# Altium PCB PCB.PcbDoc (part 2 of 2)
Units mm, origin at the board's own origin, x right, y up, seen from the top; angles counter-clockwise.
Board outline 50 x 50 mm, 8 copper layers (Top Layer, Int1, Int2, Int3, Int4, Int5, Int6, Bottom Layer), stack 1.511 mm thick; 61 components, 338 nets, 626 pads, 186 vias.
Unrouted connection lines stored in the file: 201.
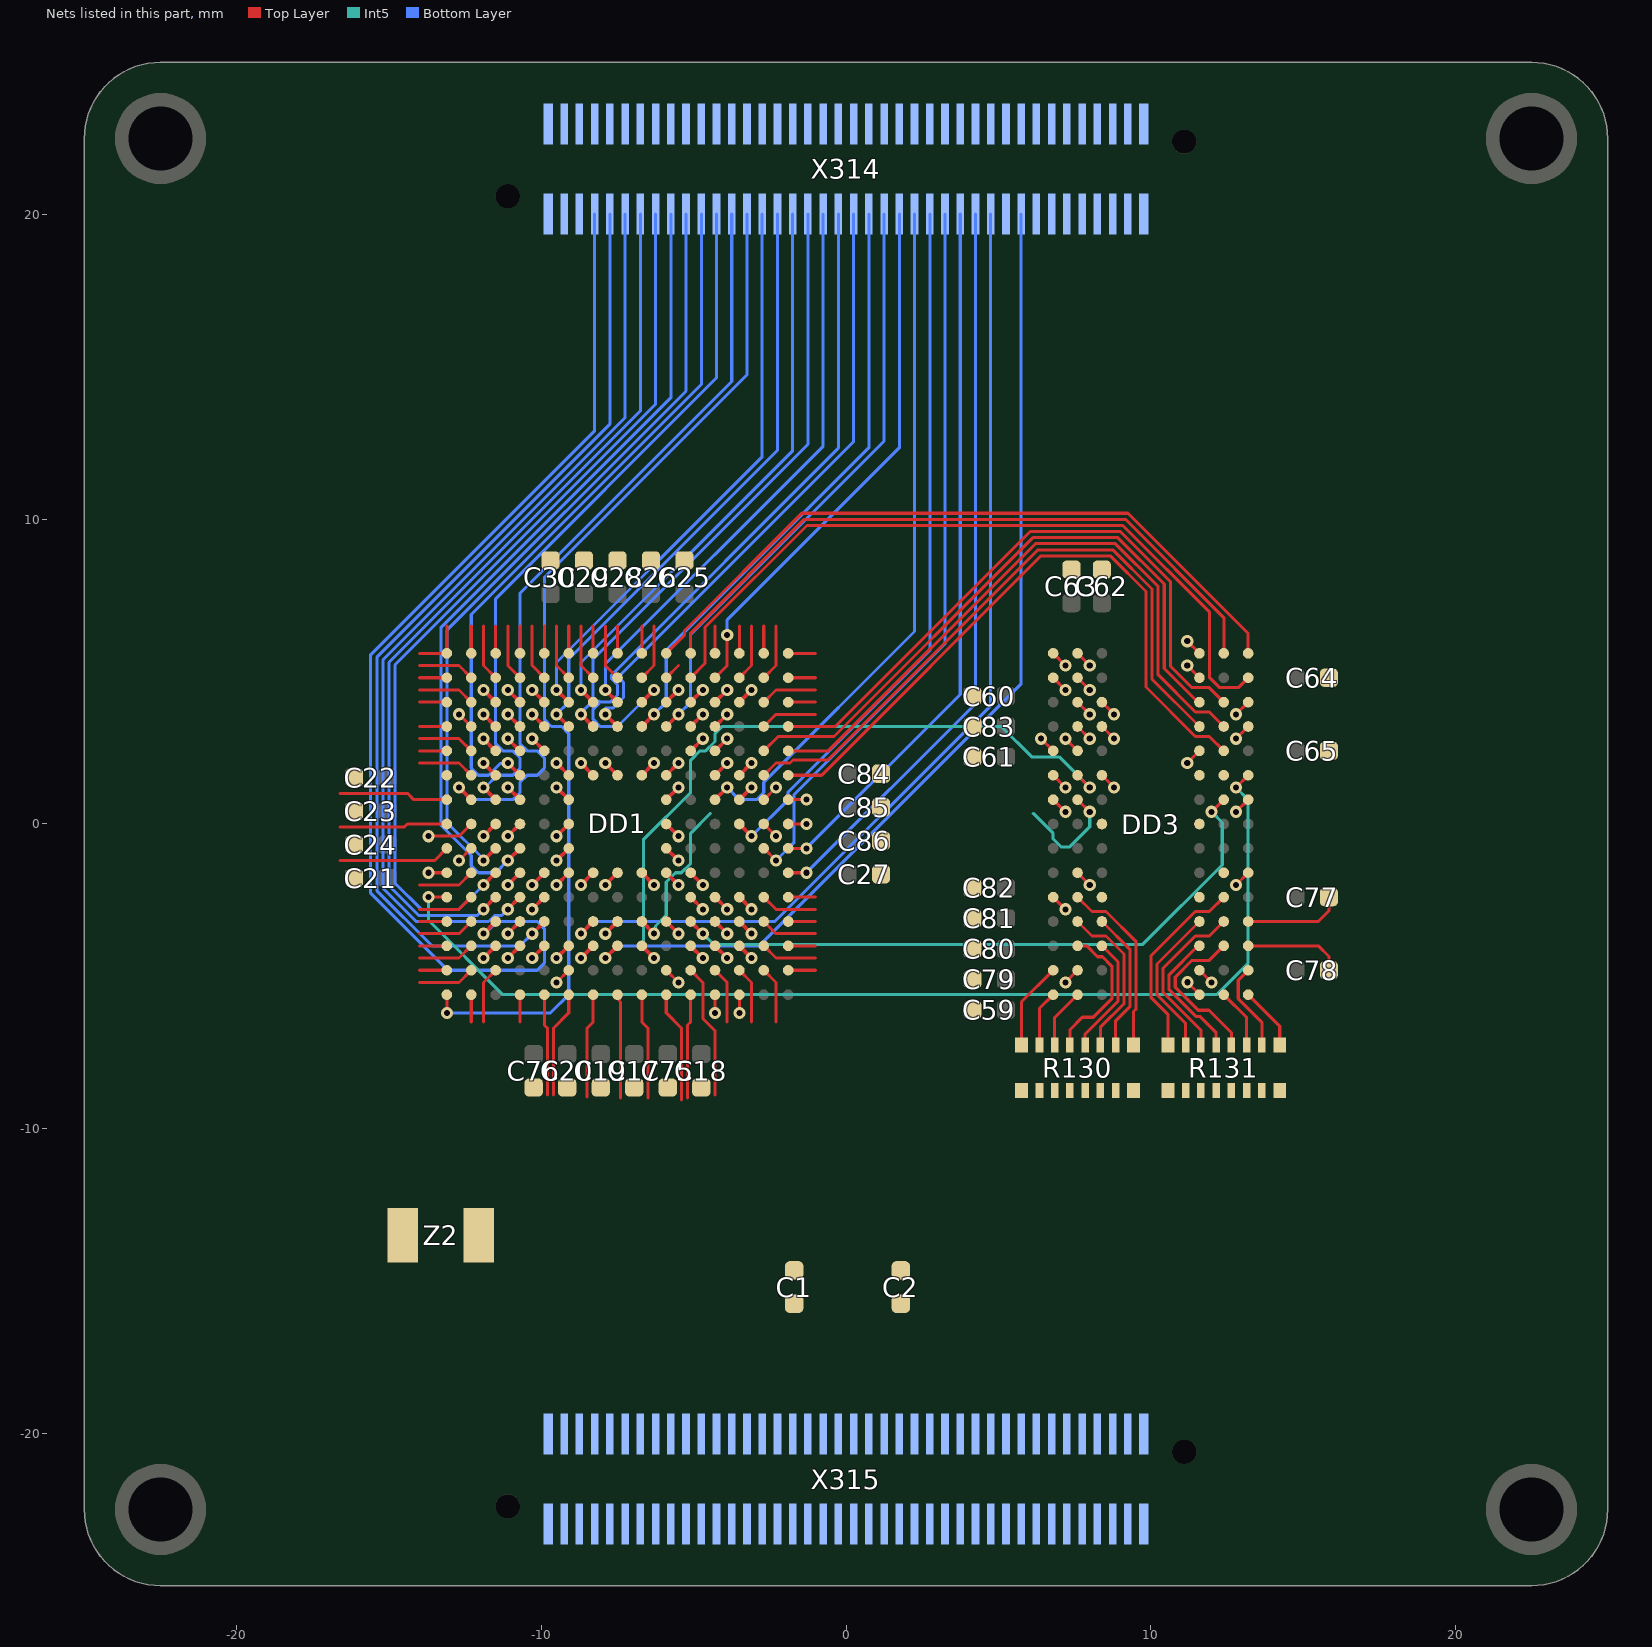
[diagram p3: the nets of this part, all layers, seen from the top]

## Via types
v1: diameter 0.4, hole 0.2, Top Layer to Bottom Layer, tented both sides, 186 vias

## Nets (pads, with @x,y where several pads share a name; then routed paths per layer and width w, separated by ;. In a path a pad name is that pad's centre, name@x,y a point inside that pad or via, vN(x,y) a via of type N, cw(c..) or ccw(c..) an arc to the next point about the centre after c; other vN are vias at no path point) (continued)
FMC_CLK: DD1.H14 DD3.J1 | length 2.4
  Top Layer w0.1: -7.9,6.5 -7.9,5.2 DD1.H14@-7.5,4.8 ; v1(12.8,0.4) DD3.J1@13.2,0.8
FMC_D0: DD1.L12 DD3.R8 | length 1.1
  Top Layer w0.1: DD3.R8@7.6,5.6 v1(8,5.2)
  Top Layer w0.125: DD1.L12@-5.1,3.2 v1(-4.7,3.6)
FMC_D1: DD1.K13 DD3.N7 | length 1.1
  Top Layer w0.1: DD3.N7@8.4,4 v1(8.8,3.6)
  Top Layer w0.125: DD1.K13@-5.9,4 v1(-5.5,4.4)
FMC_D2: DD1.B12 DD3.R9 | length 1.1
  Top Layer w0.1: v1(-12.7,3.6) DD1.B12@-12.3,3.2 ; DD3.R9@6.8,5.6 v1(7.2,5.2)
FMC_D3: DD1.C12 DD3.N8 | length 1.1
  Top Layer w0.1: DD3.N8@7.6,4 v1(8,3.6)
  Top Layer w0.125: v1(-11.9,3.6) DD1.C12@-11.5,3.2
FMC_D4: DD1.R8 DD3.P9 | length 1.2
  Top Layer w0.1: DD1.R8@-1.9,0 v1(-1.3,0) ; DD3.P9@6.8,4.8 v1(7.2,4.4)
FMC_D5: DD1.N9 DD3.M8 | length 1.1
  Top Layer w0.1: DD3.M8@7.6,3.2 v1(8,2.8)
  Top Layer w0.125: DD1.N9@-3.5,0.8 v1(-3.1,1.2)
FMC_D6: DD1.P9 DD3.M7 | length 1.1
  Top Layer w0.1: DD1.P9@-2.7,0.8 v1(-2.3,1.2) ; DD3.M7@8.4,3.2 v1(8.8,2.8)
FMC_D7: DD1.R9 DD3.L8 | length 1.2
  Top Layer w0.1: DD1.R9@-1.9,0.8 v1(-1.3,0.8) ; v1(7.2,2.8) DD3.L8@7.6,2.4
FMC_D8: DD1.P10 DD3.M3 | length 21.5
  Top Layer w0.1: DD1.P10@-2.7,1.6 -2.3,2 -1.84,2 -1.74,2.1 -0.6,2.1 6.3,9 8.757,9 10.046,7.711 10.046,4.754 DD3.M3@11.6,3.2
FMC_D9: DD1.R10 DD3.L2 | length 21.8
  Top Layer w0.1: DD1.R10@-1.9,1.6 -0.8,1.6 6.4,8.8 8.674,8.8 9.846,7.629 9.846,4.495 11.465,2.875 11.925,2.875 DD3.L2@12.4,2.4
FMC_D10: DD1.R12 DD3.N2 | length 20.9
  Top Layer w0.1: DD1.R12@-1.9,3.2 -0.349,3.2 6.051,9.6 9.006,9.6 10.646,7.96 10.646,5.189 11.359,4.475 11.925,4.475 DD3.N2@12.4,4
FMC_D11: DD1.P11 DD3.N3 | length 21.1
  Top Layer w0.1: DD1.P11@-2.7,2.4 -2.225,2.875 -0.391,2.875 6.134,9.4 8.923,9.4 10.446,7.877 10.446,5.106 11.552,4 DD3.N3@11.6,4
FMC_D12: DD1.R11 DD3.M2 | length 21.3
  Top Layer w0.1: DD1.R11@-1.9,2.4 -0.583,2.4 6.217,9.2 8.84,9.2 10.246,7.794 10.246,4.895 11.465,3.675 11.925,3.675 DD3.M2@12.4,3.2
FMC_D13: DD1.L15 DD3.R2 | length 22.2
  Top Layer w0.1: DD1.L15@-5.1,5.6 -5.1,6.266 -1.366,10 9.171,10 12.4,6.771 DD3.R2@12.4,5.6
FMC_D14: DD1.L14 DD3.P1 | length 24.7
  Top Layer w0.1: DD1.L14@-5.1,4.8 -4.625,5.275 -4.625,6.458 -1.283,9.8 9.089,9.8 11.925,6.963 11.925,4.815 12.265,4.475 12.875,4.475 DD3.P1@13.2,4.8
FMC_D15: DD1.K15 DD3.R1 | length 23.4
  Top Layer w0.1: DD1.K15@-5.9,5.6 -5.3,6.2 -5.3,6.349 -1.449,10.2 9.254,10.2 13.2,6.254 DD3.R1@13.2,5.6
FMC_NBL0: DD1.A6 DD3.K9 | length 1.2
  Top Layer w0.1: v1(-13.7,-1.6) DD1.A6@-13.1,-1.6 ; DD3.K9@6.8,1.6 v1(7.2,1.2)
FMC_NBL1: DD1.A5 DD3.K1 | length 36.2
  Top Layer w0.1: v1(-13.7,-2.4) DD1.A5@-13.1,-2.4 ; v1(12.8,1.2) DD3.K1@13.2,1.6
  Int5 w0.1: v1(-13.7,-2.4) -13.7,-3.166 -11.266,-5.6 12.166,-5.6 13.2,-4.566 13.2,0.8 v1(12.8,1.2)
FMC_NCAS: DD1.B7 DD3.K7 | length 1.1
  Top Layer w0.1: v1(-12.7,-1.2) DD1.B7@-12.3,-0.8 ; DD3.K7@8.4,1.6 v1(8.8,1.2)
FMC_NRAS: DD1.P8 DD3.J9 | length 1.1
  Top Layer w0.1: DD1.P8@-2.7,0 v1(-2.3,-0.4) ; DD3.J9@6.8,0.8 v1(7.2,0.4)
FMC_NWE: DD1.J3 DD3.K8 | length 23
  Top Layer w0.1: DD3.K8@7.6,1.6 v1(8,1.2)
  Top Layer w0.125: DD1.J3@-6.7,-4 v1(-6.3,-4.4)
  Int5 w0.1: v1(-6.3,-4.4) -6.65,-4.05 -6.65,-0.516 -5.1,1.034 -5.1,2.095 -4.795,2.4 -4.605,2.4 -4.3,2.705 -4.3,2.895 -4.3,2.966 -4.066,3.2 -3.734,3.2 -3.266,3.2 -2.934,3.2 5.1,3.2 6.096,2.204 6.996,2.204 v1(8,1.2)
FMC_SDCKE0: DD1.L4 DD3.J2 | length 21.3
  Top Layer w0.1: v1(12,0.4) DD3.J2@12.4,0.8
  Top Layer w0.125: DD1.L4@-5.1,-3.2 v1(-4.7,-3.6)
  Int5 w0.1: v1(-4.7,-3.6) -4.35,-3.95 9.745,-3.95 12.35,-1.345 12.35,0.05 v1(12,0.4)
FMC_SDNE0: DD1.J4 DD3.J8 | length 9.1
  Top Layer w0.1: DD3.J8@7.6,0.8 v1(8,0.4)
  Top Layer w0.125: DD1.J4@-6.7,-3.2 v1(-6.3,-3.6)
  Int5 w0.1: v1(-6.3,-3.6) -6.25,-3.55 -6.25,-3.35 -5.9,-3 -5.9,-1.905 -5.595,-1.6 -5.405,-1.6 -5.1,-1.295 -5.1,-0.305 -4.445,0.35 ; 6.145,0.35 6.8,-0.305 6.8,-0.495 7.055,-0.75 7.345,-0.75 8,-0.095 v1(8,0.4)
GND: C1.2 C2.2 C12.2 C13.2 C14.2 C15.2 C16.2 C17.2 C18.2 C19.2 C20.2 C21.2 C22.2 C23.2 C24.2 C25.2 C26.2 C27.2 C28.2 C29.2 C30.2 C31.2 C32.2 C59.2 C60.2 C61.2 C62.2 C63.2 C64.2 C65.2 C73.2 C74.2 C75.2 C76.2 C77.2 C78.2 C79.2 C80.2 C81.2 C82.2 C83.2 C84.2 C85.2 C86.2 DD1.F2 DD1.F6 DD1.F7 DD1.F8 DD1.F9 DD1.F10 DD1.G6 DD1.G10 DD1.H6 DD1.H10 DD1.J6 DD1.J10 DD1.K6 DD1.K7 DD1.K8 DD1.K9 DD1.K10 DD1.L6 DD1.M1 DD1.N1 DD3.A3 DD3.B3 DD3.B8 DD3.C1 DD3.D1 DD3.E9 DD3.F1 DD3.L3 DD3.L9 DD3.M1 DD3.N1 DD3.P3 DD3.P8 DD3.R3 R2.2 R4.2 R5.1 R130.9 R130.10 R130.11 R130.12 R130.13 R130.14 R130.15 R130.16 R131.9 R131.10 R131.11 R131.12 R131.13 R131.14 R131.15 R131.16 X2.6 X314.61 Z1.2 Z1.4 | length 24.7
  Top Layer w0.1: v1(-9.5,-5.2) DD1.F2@-9.1,-4.8 ; v1(-4.3,-6.2) DD1.M1@-4.3,-5.6 ; v1(-3.5,-6.2) DD1.N1@-3.5,-5.6 ; v1(6.4,2.8) DD3.L9@6.8,2.4 ; DD3.E9@6.8,-2.4 v1(7.2,-2.8) ; v1(7.2,-5.2) DD3.B8@7.6,-4.8 ; DD3.P8@7.6,4.8 v1(8,4.4) ; v1(11.2,2) DD3.L3@11.6,2.4 ; v1(11.2,5.2) DD3.P3@11.6,4.8 ; v1(11.2,6) DD3.R3@11.6,5.6 ; v1(11.207,-5.193) 11.207,-5.2 11.6,-5.593 DD3.A3@11.6,-5.6 ; DD3.B3@11.6,-4.8 v1(12,-5.2) ; v1(12.8,-2) DD3.F1@13.2,-1.6 ; v1(12.8,2.8) DD3.M1@13.2,3.2 ; v1(12.8,3.6) DD3.N1@13.2,4 ; DD3.C1@13.2,-4 15.5,-4 15.85,-4.35 C78.2@15.85,-4.8 ; DD3.D1@13.2,-3.2 15.5,-3.2 15.85,-2.85 C77.2@15.85,-2.4
  Top Layer w0.125: v1(-9.5,-2) DD1.F6@-9.1,-1.6 ; v1(-9.5,-1.2) DD1.F7@-9.1,-0.8 ; v1(-9.5,-0.4) DD1.F8@-9.1,0 ; v1(-9.5,1.2) DD1.F9@-9.1,0.8 ; v1(-9.5,2) DD1.F10@-9.1,1.6 ; v1(-8.7,-2) DD1.G6@-8.3,-1.6 ; v1(-8.7,2) DD1.G10@-8.3,1.6 ; v1(-7.9,-2) DD1.H6@-7.5,-1.6 ; v1(-7.9,2) DD1.H10@-7.5,1.6 ; DD1.J6@-6.7,-1.6 v1(-6.3,-2) ; DD1.J10@-6.7,1.6 v1(-6.3,2) ; DD1.K6@-5.9,-1.6 v1(-5.5,-2) ; DD1.K7@-5.9,-0.8 v1(-5.5,-1.2) ; DD1.K8@-5.9,0 v1(-5.5,-0.4) ; DD1.K9@-5.9,0.8 v1(-5.5,1.2) ; DD1.K10@-5.9,1.6 v1(-5.5,2) ; DD1.L6@-5.1,-1.6 v1(-4.7,-2)
LTDC_B0: DD1.A1 X314.27 | length 33.8
  Top Layer w0.1: v1(-13.1,-6.2) DD1.A1@-13.1,-5.6
  Bottom Layer w0.1: v1(-13.1,-6.2) -9.7,-6.2 -9.1,-5.6 -9.1,2.966 -9.334,3.2 -9.666,3.2 -9.9,3.434 -9.9,8.092 -3.25,14.742 X314.27@-3.25,20.025
LTDC_B1: DD1.B9 X314.25 | length 25.7
  Top Layer w0.125: v1(-12.7,1.2) DD1.B9@-12.3,0.8
  Bottom Layer w0.1: v1(-12.7,1.2) -12.3,0.8 -10.934,0.8 -10.7,1.034 -10.7,1.366 -10.466,1.6 -10.134,1.6 -9.9,1.834 -9.9,2.166 -10.134,2.4 -10.466,2.4 -10.7,2.634 -10.7,7.575 -3.75,14.525 X314.25@-3.75,20.025
LTDC_B2: DD1.C9 X314.23 | length 23.7
  Top Layer w0.125: v1(-11.9,1.2) DD1.C9@-11.5,0.8
  Bottom Layer w0.1: v1(-11.9,1.2) -11.851,1.2 -11.451,1.6 -10.934,1.6 -10.7,1.834 -10.7,2.166 -10.934,2.4 -11.266,2.4 -11.5,2.634 -11.5,7.392 -4.25,14.642 X314.23@-4.25,20.025
LTDC_B3: DD1.D10 X314.21 | length 23.3
  Top Layer w0.125: v1(-11.1,2) DD1.D10@-10.7,1.6
  Bottom Layer w0.1: v1(-11.1,2) -11.116,1.984 -11.35,1.984 -11.734,1.6 -12.066,1.6 -12.3,1.834 -12.3,6.875 -4.75,14.425 X314.21@-4.75,20.025
LTDC_B4: DD1.C7 X314.19 | length 25.5
  Top Layer w0.125: v1(-11.9,-1.2) DD1.C7@-11.5,-0.8
  Bottom Layer w0.1: v1(-11.9,-1.2) -11.9,-1.151 -13.1,0.049 -13.1,6.358 -5.25,14.208 X314.19@-5.25,20.025
LTDC_B5: DD1.D7 X314.17 | length 27
  Top Layer w0.125: v1(-11.1,-1.2) DD1.D7@-10.7,-0.8
  Bottom Layer w0.1: v1(-11.1,-1.2) -11.5,-1.6 -12.066,-1.6 -12.3,-1.366 -12.3,-1.034 -13.3,-0.034 -13.3,6.441 -5.75,13.991 X314.17@-5.75,20.025
LTDC_B6: DD1.C6 X314.15 | length 29.7
  Top Layer w0.125: v1(-11.9,-2) DD1.C6@-11.5,-1.6
  Bottom Layer w0.1: v1(-11.9,-2) -12.7,-2.8 -13.941,-2.8 -14.8,-1.941 -14.8,5.224 -6.25,13.774 X314.15@-6.25,20.025
LTDC_B7: DD1.C5 X314.13 | length 29.6
  Top Layer w0.125: v1(-11.9,-2.8) DD1.C5@-11.5,-2.4
  Bottom Layer w0.1: v1(-11.9,-2.8) -12.1,-3 -14.023,-3 -15,-2.024 -15,5.306 -6.75,13.556 X314.13@-6.75,20.025
LTDC_G0: DD1.J12 X314.43 | length 19.9
  Top Layer w0.125: DD1.J12@-6.7,3.2 v1(-6.3,3.6)
  Bottom Layer w0.1: v1(-6.3,3.6) -5.9,4 -5.9,5.7 0.75,12.35 X314.43@0.75,20.025
LTDC_G1: DD1.H12 X314.41 | length 20.7
  Top Layer w0.125: v1(-7.9,3.6) DD1.H12@-7.5,3.2
  Bottom Layer w0.1: v1(-7.9,3.6) -7.9,3.8 -7.651,3.8 -7.3,4.151 -7.3,4.649 -7.477,4.826 0.25,12.553 X314.41@0.25,20.025
LTDC_G2: DD1.J13 X314.39 | length 23.5
  Top Layer w0.125: DD1.J13@-6.7,4 v1(-6.3,4.4)
  Bottom Layer w0.1: v1(-6.3,4.4) -7.5,3.2 -8.066,3.2 -8.3,3.434 -8.3,3.766 -8.1,3.966 -8.1,4.034 -8.066,4 -7.734,4 -7.5,4.234 -7.5,4.566 -7.7,4.766 -7.7,4.886 -0.25,12.336 X314.39@-0.25,20.025
LTDC_G3: DD1.H13 X314.37 | length 19.2
  Top Layer w0.125: v1(-7.9,4.4) DD1.H13@-7.5,4
  Bottom Layer w0.1: v1(-7.9,4.4) -7.9,5.252 -0.75,12.401 X314.37@-0.75,20.025
LTDC_G4: DD1.G12 X314.35 | length 20.1
  Top Layer w0.125: v1(-8.7,3.6) DD1.G12@-8.3,3.2
  Bottom Layer w0.1: v1(-8.7,3.6) -8.7,3.649 -8.3,4.049 -8.3,5.417 -1.25,12.467 X314.35@-1.25,20.025
LTDC_G5: DD1.G13 X314.33 | length 19.1
  Top Layer w0.125: v1(-8.7,4.4) DD1.G13@-8.3,4
  Bottom Layer w0.1: v1(-8.7,4.4) -8.7,5.3 -1.75,12.25 X314.33@-1.75,20.025
LTDC_G6: DD1.F12 X314.31 | length 20
  Top Layer w0.125: v1(-9.5,3.6) DD1.F12@-9.1,3.2
  Bottom Layer w0.1: v1(-9.5,3.6) -9.1,4 -9.1,5.417 -2.25,12.267 X314.31@-2.25,20.025
LTDC_G7: DD1.F13 X314.29 | length 19
  Top Layer w0.125: v1(-9.5,4.4) DD1.F13@-9.1,4
  Bottom Layer w0.1: v1(-9.5,4.4) -9.5,5.3 -2.75,12.05 X314.29@-2.75,20.025
LTDC_R0: DD1.G4 X314.59 | length 33.3
  Top Layer w0.125: v1(-8.7,-3.6) DD1.G4@-8.3,-3.2
  Bottom Layer w0.1: v1(-8.7,-3.6) -8.3,-3.2 -2.334,-3.2 4.75,3.884 X314.59@4.75,20.025
LTDC_R1: DD1.R6 X314.57 | length 24.5
  Top Layer w0.1: DD1.R6@-1.9,-1.6 v1(-1.3,-1.6)
  Bottom Layer w0.1: v1(-1.3,-1.6) 4.25,3.95 X314.57@4.25,20.025
LTDC_R2: DD1.R7 X314.55 | length 23.5
  Top Layer w0.1: DD1.R7@-1.9,-0.8 v1(-1.3,-0.8)
  Bottom Layer w0.1: v1(-1.3,-0.8) 3.75,4.25 X314.55@3.75,20.025
LTDC_R3: DD1.P7 X314.53 | length 24.1
  Top Layer w0.1: DD1.P7@-2.7,-0.8 v1(-2.3,-1.2)
  Bottom Layer w0.1: v1(-2.3,-1.2) -1.7,-0.6 -1.7,0.951 ; -1.7,0.951 -1.7,0.966 3.25,5.916 X314.53@3.25,20.025
LTDC_R4: DD1.N8 X314.51 | length 23.4
  Top Layer w0.125: DD1.N8@-3.5,0 v1(-3.1,-0.4)
  Bottom Layer w0.1: v1(-3.1,-0.4) -1.9,0.8 -1.9,1.034 -1.9,1.049 2.75,5.699 X314.51@2.75,20.025
LTDC_R5: DD1.M9 X314.49 | length 23.1
  Top Layer w0.125: DD1.M9@-4.3,0.8 v1(-3.9,1.2)
  Bottom Layer w0.1: v1(-3.9,1.2) -3.5,0.8 -2.934,0.8 -2.7,1.034 -2.7,1.366 2.25,6.316 X314.49@2.25,20.025
LTDC_R6: DD1.M14 X314.47 | length 17.7
  Top Layer w0.1: DD1.M14@-4.3,4.8 -3.9,5.2 -3.9,5.9 v1(-3.9,6.2)
  Bottom Layer w0.1: v1(-3.9,6.2) -3.9,6.7 1.75,12.35 X314.47@1.75,20.025
LTDC_R7: DD1.K12 X314.45 | length 19.8
  Top Layer w0.125: DD1.K12@-5.9,3.2 v1(-5.5,3.6)
  Bottom Layer w0.1: v1(-5.5,3.6) -5.1,4 -5.1,6.217 1.25,12.567 X314.45@1.25,20.025
NetC31_1: C31.1 DD1.E11 | length 0.6
  Top Layer w0.125: v1(-10.3,2.8) DD1.E11@-9.9,2.4
NetC32_1: C32.1 DD1.L11 | length 0.6
  Top Layer w0.125: DD1.L11@-5.1,2.4 v1(-4.7,2.8)
NetDD1_E5: DD1.E5 R3.1 R4.1 | length 0.6
  Top Layer w0.125: v1(-10.3,-2.8) DD1.E5@-9.9,-2.4
NetDD1_E6: DD1.E6 R1.1 R2.1 | length 0.6
  Top Layer w0.125: v1(-10.3,-2) DD1.E6@-9.9,-1.6
NetDD1_L5: DD1.L5 R5.2 | length 0.6
  Top Layer w0.125: DD1.L5@-5.1,-2.4 v1(-4.7,-2.8)
NetDD3_A1: DD3.A1 R131.1 | length 2.1
  Top Layer w0.1: DD3.A1@13.2,-5.6 14.238,-6.637 R131.1@14.238,-7.25
NetDD3_A2: DD3.A2 R131.3 | length 2
  Top Layer w0.1: DD3.A2@12.4,-5.6 13.15,-6.35 R131.3@13.15,-7.25
NetDD3_A8: DD3.A8 R130.6 | length 2
  Top Layer w0.1: R130.6@6.85,-7.25 6.85,-6.35 DD3.A8@7.6,-5.6
NetDD3_A9: DD3.A9 R130.7 | length 1.8
  Top Layer w0.1: R130.7@6.35,-7.25 6.35,-6.05 DD3.A9@6.8,-5.6
NetDD3_B1: DD3.B1 R131.2 | length 2.9
  Top Layer w0.1: DD3.B1@13.2,-4.8 12.875,-5.125 12.875,-5.735 13.65,-6.51 R131.2@13.65,-7.25
NetDD3_B9: DD3.B9 R130.8 | length 2.9
  Top Layer w0.1: R130.8@5.762,-7.25 5.762,-5.838 DD3.B9@6.8,-4.8
NetDD3_C2: DD3.C2 R131.4 | length 5.2
  Top Layer w0.1: DD3.C2@12.4,-4 11.925,-4.475 11.359,-4.475 10.807,-5.027 10.807,-5.359 11.561,-6.113 11.913,-6.113 12.65,-6.85 R131.4@12.65,-7.25
NetDD3_C3: DD3.C3 R131.5 | length 4.4
  Top Layer w0.1: DD3.C3@11.6,-4 11.551,-4 10.607,-4.944 10.607,-5.441 11.479,-6.313 11.613,-6.313 12.15,-6.85 R131.5@12.15,-7.25
NetDD3_C7: DD3.C7 R130.4 | length 3.9
  Top Layer w0.1: R130.4@7.85,-7.25 7.85,-6.893 8.925,-5.817 8.925,-4.525 DD3.C7@8.4,-4
NetDD3_C8: DD3.C8 R130.5 | length 4.8
  Top Layer w0.1: R130.5@7.35,-7.25 7.35,-6.75 7.758,-6.342 8.117,-6.342 8.725,-5.735 8.725,-4.665 8.416,-4.357 8.257,-4.357 7.9,-4 DD3.C8@7.6,-4
NetDD3_D2: DD3.D2 R131.6 | length 5.7
  Top Layer w0.1: R131.6@11.65,-7.25 11.65,-6.767 10.407,-5.524 10.407,-4.733 11.465,-3.675 11.925,-3.675 DD3.D2@12.4,-3.2
NetDD3_D3: DD3.D3 R131.7 | length 5
  Top Layer w0.1: R131.7@11.15,-7.25 11.15,-6.55 10.207,-5.607 10.207,-4.593 DD3.D3@11.6,-3.2
NetDD3_D7: DD3.D7 R130.2 | length 4.6
  Top Layer w0.1: DD3.D7@8.4,-3.2 9.325,-4.125 9.325,-5.983 8.85,-6.458 R130.2@8.85,-7.25
NetDD3_D8: DD3.D8 R130.3 | length 5.3
  Top Layer w0.1: DD3.D8@7.6,-3.2 8.075,-3.675 8.535,-3.675 9.125,-4.265 9.125,-5.9 8.35,-6.675 R130.3@8.35,-7.25
NetDD3_E2: DD3.E2 R131.8 | length 6.3
  Top Layer w0.1: R131.8@10.563,-7.25 10.563,-6.245 10.007,-5.69 10.007,-4.333 11.465,-2.875 11.925,-2.875 DD3.E2@12.4,-2.4
NetDD3_E3: DD3.E3
NetDD3_E7: DD3.E7
NetDD3_E8: DD3.E8 R130.1 | length 6
  Top Layer w0.1: DD3.E8@7.6,-2.4 8.075,-2.875 8.535,-2.875 9.525,-3.865 9.525,-6.066 9.437,-6.154 R130.1@9.437,-7.25
NetDD3_F2: DD3.F2
NetDD3_F8: DD3.F8 | length 0.6
  Top Layer w0.1: DD3.F8@7.6,-1.6 v1(8,-2)
NetDD3_H3: DD3.H3
NetDD3_H7: DD3.H7
NetDD3_K2: DD3.K2
NetDD3_K3: DD3.K3
NetX2_1: X2.1
NetX2_4: X2.4
NetX2_5: X2.5
NetX314_1: X314.1
NetX314_2: X314.2
NetX314_3: X314.3
NetX314_4: X314.4
NetX314_5: X314.5
NetX314_6: X314.6
NetX314_8: X314.8
NetX314_10: X314.10
NetX314_12: X314.12
NetX314_14: X314.14
NetX314_16: X314.16
NetX314_18: X314.18
NetX314_20: X314.20
NetX314_22: X314.22
NetX314_24: X314.24
NetX314_26: X314.26
NetX314_28: X314.28
NetX314_30: X314.30
NetX314_32: X314.32
NetX314_34: X314.34
NetX314_36: X314.36
NetX314_38: X314.38
NetX314_40: X314.40
NetX314_42: X314.42
NetX314_44: X314.44
NetX314_46: X314.46
NetX314_48: X314.48
NetX314_50: X314.50
NetX314_52: X314.52
NetX314_54: X314.54
NetX314_56: X314.56
NetX314_58: X314.58
NetX314_60: X314.60
NetX314_62: X314.62
NetX314_64: X314.64
NetX314_65: X314.65
NetX314_66: X314.66
NetX314_67: X314.67
NetX314_68: X314.68
NetX314_69: X314.69
NetX314_70: X314.70
NetX314_71: X314.71
NetX314_72: X314.72
NetX314_73: X314.73
NetX314_74: X314.74
NetX314_75: X314.75
NetX314_76: X314.76
NetX314_77: X314.77
NetX314_78: X314.78
NetX314_79: X314.79
NetX314_80: X314.80
NetX315_1: X315.1
NetX315_2: X315.2
NetX315_3: X315.3
NetX315_4: X315.4
NetX315_5: X315.5
NetX315_6: X315.6
NetX315_7: X315.7
NetX315_8: X315.8
NetX315_9: X315.9
NetX315_10: X315.10
NetX315_11: X315.11
NetX315_12: X315.12
NetX315_13: X315.13
NetX315_14: X315.14
NetX315_15: X315.15
NetX315_16: X315.16
NetX315_17: X315.17
NetX315_18: X315.18
NetX315_19: X315.19
NetX315_20: X315.20
NetX315_21: X315.21
NetX315_22: X315.22
NetX315_23: X315.23
NetX315_24: X315.24
NetX315_25: X315.25
NetX315_26: X315.26
NetX315_27: X315.27
NetX315_28: X315.28
NetX315_29: X315.29
NetX315_30: X315.30
NetX315_31: X315.31
NetX315_32: X315.32
NetX315_33: X315.33
NetX315_34: X315.34
NetX315_35: X315.35
NetX315_36: X315.36
NetX315_37: X315.37
NetX315_38: X315.38
NetX315_39: X315.39
NetX315_40: X315.40
NetX315_41: X315.41
NetX315_42: X315.42
NetX315_43: X315.43
NetX315_44: X315.44
NetX315_45: X315.45
NetX315_46: X315.46
NetX315_47: X315.47
NetX315_48: X315.48
NetX315_49: X315.49
NetX315_50: X315.50
NetX315_51: X315.51
NetX315_52: X315.52
NetX315_53: X315.53
NetX315_54: X315.54
NetX315_55: X315.55
NetX315_56: X315.56
NetX315_57: X315.57
NetX315_58: X315.58
NetX315_59: X315.59
NetX315_60: X315.60
NetX315_61: X315.61
NetX315_62: X315.62
NetX315_63: X315.63
NetX315_64: X315.64
NetX315_65: X315.65
NetX315_66: X315.66
NetX315_67: X315.67
NetX315_68: X315.68
NetX315_69: X315.69
NetX315_70: X315.70
NetX315_71: X315.71
NetX315_72: X315.72
NetX315_73: X315.73
NetX315_74: X315.74
NetX315_75: X315.75
NetX315_76: X315.76
NetX315_77: X315.77
NetX315_78: X315.78
NetX315_79: X315.79
NetX315_80: X315.80
NRST: C16.1 DD1.J1 R8.2 | length 3.5
  Top Layer w0.1: DD1.J1@-6.7,-5.6 -6.7,-6.5 -6.5,-6.7 -6.5,-8.999
PA0: DD1.N3 | length 0.6
  Top Layer w0.125: DD1.N3@-3.5,-4 v1(-3.1,-4.4)
PA1: DD1.N2 | length 1.9
  Top Layer w0.1: DD1.N2@-3.5,-4.8 -3.1,-5.2 -3.1,-6.5
PA2: DD1.P2 | length 1.9
  Top Layer w0.1: DD1.P2@-2.7,-4.8 -2.3,-5.2 -2.3,-6.5
PA3: DD1.R2 | length 0.9
  Top Layer w0.1: DD1.R2@-1.9,-4.8 -1,-4.8
PA4: DD1.N4 | length 0.6
  Top Layer w0.125: DD1.N4@-3.5,-3.2 v1(-3.1,-3.6)
PA5: DD1.P4 | length 1.9
  Top Layer w0.1: DD1.P4@-2.7,-3.2 -2.3,-3.6 -1,-3.6
PA6: DD1.P3 | length 1.9
  Top Layer w0.1: DD1.P3@-2.7,-4 -2.3,-4.4 -1,-4.4
PA7: DD1.R3 | length 0.9
  Top Layer w0.1: DD1.R3@-1.9,-4 -1,-4
PA8: DD1.F15 | length 0.9
  Top Layer w0.1: DD1.F15@-9.1,5.6 -9.1,6.5
PA9: DD1.E15 | length 0.9
  Top Layer w0.1: DD1.E15@-9.9,5.6 -9.9,6.5
PA10: DD1.D15 | length 0.9
  Top Layer w0.1: DD1.D15@-10.7,5.6 -10.7,6.5
PA11: DD1.C15 | length 0.9
  Top Layer w0.1: DD1.C15@-11.5,5.6 -11.5,6.5
PA12: DD1.B15 | length 0.9
  Top Layer w0.1: DD1.B15@-12.3,5.6 -12.3,6.5
PA13: DD1.A15 X2.2 | length 1.8
  Top Layer w0.1: -14,5.6 DD1.A15@-13.1,5.6 -13.1,6.5
PA14: DD1.A14 X2.3 | length 0.9
  Top Layer w0.1: -14,4.8 DD1.A14@-13.1,4.8
PA15: DD1.A13 | length 0.9
  Top Layer w0.1: -14,4 DD1.A13@-13.1,4
PB0: DD1.R5 | length 0.9
  Top Layer w0.1: DD1.R5@-1.9,-2.4 -1,-2.4
PB1: DD1.R4 | length 0.9
  Top Layer w0.1: DD1.R4@-1.9,-3.2 -1,-3.2
PB2: DD1.M5 | length 0.6
  Top Layer w0.125: DD1.M5@-4.3,-2.4 v1(-3.9,-2.8)
PB3: DD1.A10
PB4: DD1.A9 | length 3.6
  Top Layer w0.1: -16.6,1 -14.384,1 -14.184,0.8 DD1.A9@-13.1,0.8
PB5: DD1.A8 | length 3.5
  Top Layer w0.1: -16.6,-0.1 -14.5,-0.1 -14.4,0 DD1.A8@-13.1,0
PB6: DD1.B6 | length 1.9
  Top Layer w0.1: -14,-2 -12.7,-2 DD1.B6@-12.3,-1.6
PB7: DD1.B5 | length 1.9
  Top Layer w0.1: -14,-2.8 -12.7,-2.8 DD1.B5@-12.3,-2.4
PB8: DD1.A7 | length 3.7
  Top Layer w0.1: -16.6,-1.2 -13.5,-1.2 DD1.A7@-13.1,-0.8
PB9: DD1.B4 | length 1.9
  Top Layer w0.1: -14,-3.6 -12.7,-3.6 DD1.B4@-12.3,-3.2
PB10: DD1.P12 | length 1.9
  Top Layer w0.1: DD1.P12@-2.7,3.2 -2.3,3.6 -1,3.6
PB11: DD1.R13 | length 0.9
  Top Layer w0.1: DD1.R13@-1.9,4 -1,4
PB12: DD1.L13 | length 0.6
  Top Layer w0.125: DD1.L13@-5.1,4 v1(-4.7,4.4)
PB13: DD1.K14 | length 0.6
  Top Layer w0.1: DD1.K14@-5.9,4.8 -5.5,5.2
PB14: DD1.R14 | length 0.9
  Top Layer w0.1: DD1.R14@-1.9,4.8 -1,4.8
PB15: DD1.R15 | length 0.9
  Top Layer w0.1: DD1.R15@-1.9,5.6 -1,5.6
PC0: DD1.M2 | length 1.9
  Top Layer w0.1: DD1.M2@-4.3,-4.8 -3.9,-5.2 -3.9,-6.5
PC1: DD1.M3 | length 0.6
  Top Layer w0.125: DD1.M3@-4.3,-4 v1(-3.9,-4.4)
PC2: DD1.M4 | length 0.6
  Top Layer w0.125: DD1.M4@-4.3,-3.2 v1(-3.9,-3.6)
PC4: DD1.N5 | length 0.6
  Top Layer w0.125: DD1.N5@-3.5,-2.4 v1(-3.1,-2.8)
PC5: DD1.P5 | length 1.9
  Top Layer w0.1: DD1.P5@-2.7,-2.4 -2.3,-2.8 -1,-2.8
PC6: DD1.H15 | length 0.9
  Top Layer w0.1: DD1.H15@-7.5,5.6 -7.5,6.5
PC7: DD1.G15 | length 0.9
  Top Layer w0.1: DD1.G15@-8.3,5.6 -8.3,6.5
PC12: DD1.A12 | length 0.9
  Top Layer w0.1: -14,3.2 DD1.A12@-13.1,3.2
PC13: DD1.D1 | length 0.9
  Top Layer w0.1: -10.7,-6.5 DD1.D1@-10.7,-5.6
PC14: C1.1 DD1.E1 Z2.1 | length 3.3
  Top Layer w0.1: DD1.E1@-9.9,-5.6 -9.9,-6.5 -9.9,-6.6 -9.8,-6.7 -9.8,-8.9
PC15: C2.1 DD1.F1 Z2.2 | length 3.5
  Top Layer w0.1: -9.6,-8.9 -9.6,-6.7 -9.1,-6.2 DD1.F1@-9.1,-5.6
PD2: DD1.D12 | length 0.6
  Top Layer w0.125: v1(-11.1,3.6) DD1.D12@-10.7,3.2
PD3: DD1.C11 | length 0.6
  Top Layer w0.125: v1(-11.9,2.8) DD1.C11@-11.5,2.4
PD4: DD1.D11 | length 0.6
  Top Layer w0.125: v1(-11.1,2.8) DD1.D11@-10.7,2.4
PD5: DD1.C10 | length 0.6
  Top Layer w0.125: v1(-11.9,2) DD1.C10@-11.5,1.6
PD6: DD1.B11 | length 1.9
  Top Layer w0.1: -14,2.8 -12.7,2.8 DD1.B11@-12.3,2.4
PD7: DD1.A11 | length 0.9
  Top Layer w0.1: -14,2.4 DD1.A11@-13.1,2.4
PD11: DD1.N10 | length 0.6
  Top Layer w0.125: DD1.N10@-3.5,1.6 v1(-3.1,2)
PD12: DD1.M10 | length 0.6
  Top Layer w0.125: DD1.M10@-4.3,1.6 v1(-3.9,2)
PD13: DD1.M11 | length 0.6
  Top Layer w0.125: DD1.M11@-4.3,2.4 v1(-3.9,2.8)
PE3: DD1.A2 | length 0.9
  Top Layer w0.1: -14,-4.8 DD1.A2@-13.1,-4.8
PE5: DD1.B1 | length 0.9
  Top Layer w0.1: -12.3,-6.5 DD1.B1@-12.3,-5.6
PE6: DD1.B2 | length 1.9
  Top Layer w0.1: -14,-5.2 -12.7,-5.2 DD1.B2@-12.3,-4.8
PF7: DD1.K1 | length 3.7
  Top Layer w0.1: DD1.K1@-5.9,-5.6 -5.9,-6.2 -5.4,-6.7 -5.4,-9.053
PF10: DD1.L1 | length 3.4
  Top Layer w0.1: -5.2,-9 -5.2,-6.6 -5.1,-6.5 DD1.L1@-5.1,-5.6
PG2: DD1.M13 | length 0.6
  Top Layer w0.125: DD1.M13@-4.3,4 v1(-3.9,4.4)
PG3: DD1.M12 | length 0.6
  Top Layer w0.125: DD1.M12@-4.3,3.2 v1(-3.9,3.6)
PG6: DD1.J15 | length 0.9
  Top Layer w0.1: DD1.J15@-6.7,5.6 -6.7,6.5
PG7: DD1.J14 | length 1.9
  Top Layer w0.1: DD1.J14@-6.7,4.8 -6.3,5.2 -6.3,6.5
PG9: DD1.D9 | length 0.6
  Top Layer w0.125: v1(-11.1,1.2) DD1.D9@-10.7,0.8
PG10: DD1.C8 | length 0.6
  Top Layer w0.125: v1(-11.9,-0.4) DD1.C8@-11.5,0
PG11: DD1.B8 | length 1.6
  Top Layer w0.1: v1(-13.7,-0.4) -12.7,-0.4 DD1.B8@-12.3,0
PG13: DD1.B3 | length 1.9
  Top Layer w0.1: -14,-4.4 -12.7,-4.4 DD1.B3@-12.3,-4
PG14: DD1.A4 | length 0.9
  Top Layer w0.1: -14,-3.2 DD1.A4@-13.1,-3.2
PH0: C14.1 DD1.G1 Z1.1 | length 3.4
  Top Layer w0.1: -8.5,-8.952 -8.5,-6.7 -8.3,-6.5 DD1.G1@-8.3,-5.6
PH1: C15.1 DD1.H1 Z1.3 | length 3.4
  Top Layer w0.1: DD1.H1@-7.5,-5.6 -7.452,-5.648 -7.452,-5.79 -7.4,-5.842 -7.4,-8.992
PH2: DD1.K4 | length 0.6
  Top Layer w0.125: DD1.K4@-5.9,-3.2 v1(-5.5,-3.6)
PH4: DD1.H4 | length 0.6
  Top Layer w0.125: v1(-7.9,-3.6) DD1.H4@-7.5,-3.2
PH6: DD1.P13 | length 1.9
  Top Layer w0.1: DD1.P13@-2.7,4 -2.3,4.4 -1,4.4
PH7: DD1.N13 | length 0.6
  Top Layer w0.125: DD1.N13@-3.5,4 v1(-3.1,4.4)
PH8: DD1.P14 | length 1.9
  Top Layer w0.1: DD1.P14@-2.7,4.8 -2.3,5.2 -2.3,6.5
PH9: DD1.N14 | length 1.9
  Top Layer w0.1: DD1.N14@-3.5,4.8 -3.1,5.2 -3.1,6.5
PH10: DD1.P15 | length 0.9
  Top Layer w0.1: DD1.P15@-2.7,5.6 -2.7,6.5
PH11: DD1.N15 | length 0.9
  Top Layer w0.1: DD1.N15@-3.5,5.6 -3.5,6.5
PH12: DD1.M15 | length 0.9
  Top Layer w0.1: DD1.M15@-4.3,5.6 -4.3,6.5
PH13: DD1.E12 | length 0.6
  Top Layer w0.125: v1(-10.3,3.6) DD1.E12@-9.9,3.2
PH14: DD1.E13 | length 0.6
  Top Layer w0.125: v1(-10.3,4.4) DD1.E13@-9.9,4
PH15: DD1.D13 | length 0.6
  Top Layer w0.125: v1(-11.1,4.4) DD1.D13@-10.7,4
PI0: DD1.E14 | length 1.9
  Top Layer w0.1: -10.3,6.5 -10.3,5.2 DD1.E14@-9.9,4.8
PI1: DD1.D14 | length 1.9
  Top Layer w0.1: -11.1,6.5 -11.1,5.2 DD1.D14@-10.7,4.8
PI2: DD1.C14 | length 1.9
  Top Layer w0.1: -11.9,6.5 -11.9,5.2 DD1.C14@-11.5,4.8
PI3: DD1.C13 | length 0.6
  Top Layer w0.125: v1(-11.9,4.4) DD1.C13@-11.5,4
PI4: DD1.C3 | length 0.6
  Top Layer w0.125: v1(-11.9,-4.4) DD1.C3@-11.5,-4
PI5: DD1.D3 | length 0.6
  Top Layer w0.125: v1(-11.1,-4.4) DD1.D3@-10.7,-4
PI6: DD1.D6 | length 0.6
  Top Layer w0.125: v1(-11.1,-2) DD1.D6@-10.7,-1.6
PI7: DD1.D4 | length 0.6
  Top Layer w0.125: v1(-11.1,-3.6) DD1.D4@-10.7,-3.2
PI8: DD1.C2 | length 1.9
  Top Layer w0.1: -11.9,-6.5 -11.9,-5.2 DD1.C2@-11.5,-4.8
PI9: DD1.E4 X314.9 | length 32
  Top Layer w0.125: v1(-10.3,-3.6) DD1.E4@-9.9,-3.2
  Bottom Layer w0.1: v1(-10.3,-3.6) -10.7,-4 -13.589,-4 -15.4,-2.189 -15.4,5.472 -7.75,13.122 X314.9@-7.75,20.025
PI10: DD1.D5 X314.11 | length 30.7
  Top Layer w0.125: v1(-11.1,-2.8) DD1.D5@-10.7,-2.4
  Bottom Layer w0.1: v1(-11.1,-2.8) -11.3,-3 -11.534,-3 -11.734,-3.2 -12.066,-3.2 -14.106,-3.2 -15.2,-2.106 -15.2,5.389 -7.25,13.339 X314.11@-7.25,20.025
PI11: DD1.F3 | length 0.6
  Top Layer w0.125: v1(-9.5,-4.4) DD1.F3@-9.1,-4
PI12: DD1.E3 | length 0.6
  Top Layer w0.125: v1(-10.3,-4.4) DD1.E3@-9.9,-4
PI13: DD1.G3 | length 0.6
  Top Layer w0.125: v1(-8.7,-4.4) DD1.G3@-8.3,-4
PI14: DD1.H3 X314.63 | length 33.4
  Top Layer w0.125: v1(-7.9,-4.4) DD1.H3@-7.5,-4
  Bottom Layer w0.1: v1(-7.9,-4.4) -7.5,-4 -2.851,-4 5.75,4.601 X314.63@5.75,20.025
PJ12: DD1.B10 | length 1.9
  Top Layer w0.1: -14,2 -12.7,2 DD1.B10@-12.3,1.6
PK3: DD1.D8 | length 0.6
  Top Layer w0.125: v1(-11.1,-0.4) DD1.D8@-10.7,0
PK7: DD1.C4 X314.7 | length 36.1
  Top Layer w0.125: v1(-11.9,-3.6) DD1.C4@-11.5,-3.2
  Bottom Layer w0.1: v1(-11.9,-3.6) -11.851,-3.6 -11.451,-3.2 -10.134,-3.2 -9.9,-3.434 -9.9,-4.566 -10.134,-4.8 -13.072,-4.8 -15.6,-2.272 -15.6,5.555 -8.25,12.905 X314.7@-8.25,20.025
QSPI_IO0: DD1.L3 | length 0.6
  Top Layer w0.125: DD1.L3@-5.1,-4 v1(-4.7,-4.4)
QSPI_IO1: DD1.L2 | length 4.4
  Top Layer w0.1: DD1.L2@-5.1,-4.8 -4.7,-5.2 -4.7,-6.384 -4.3,-6.784 -4.3,-8.9
QSPI_IO2: DD1.A3 | length 0.9
  Top Layer w0.1: -14,-4 DD1.A3@-13.1,-4
QSPI_IO3: DD1.K2 | length 0.6
  Top Layer w0.1: DD1.K2@-5.9,-4.8 v1(-5.5,-5.2)
SDMMC_D0: DD1.G14 | length 1.9
  Top Layer w0.1: -8.7,6.5 -8.7,5.2 DD1.G14@-8.3,4.8
SDMMC_D1: DD1.F14 | length 1.9
  Top Layer w0.1: -9.5,6.5 -9.5,5.2 DD1.F14@-9.1,4.8
SDMMC_D2: DD1.B14 | length 1.9
  Top Layer w0.1: -14,5.2 -12.7,5.2 DD1.B14@-12.3,4.8
SDMMC_D3: DD1.B13 | length 1.9
  Top Layer w0.1: -14,4.4 -12.7,4.4 DD1.B13@-12.3,4
pads on no net: X314.H1 X314.H2 X315.H1 X315.H2

## Silkscreen, mask and mechanical layers (free items; w line width, h text height)
Auxiliary:
  lines w0.1: 31.5,-21.5 31.5,33 ; 35,-21.5 35,33
  lines w0.2: -33.5,-33.5 -31.5,-31.5 ; -33.5,-31.5 -31.5,-33.5 ; -33.5,32 -31.5,34 ; -33.5,34 -31.5,32 ; -32.5,-21.5 93.5,-21.5 ; -32.5,27.5 93.5,27.5 ; -4.5,-22.5 -2.5,-20.5 ; -4.5,-20.5 -2.5,-22.5 ; -4.5,26.5 -2.5,28.5 ; -4.5,28.5 -2.5,26.5 ; -3.5,-32.5 -3.5,33 ; -3.5,0.5 54.5,0.5 ; -3.5,12.5 54.5,12.5 ; 19,-32.5 19,33 ; 31.5,0.5 31.5,12.5 ; 33.25,27.5 33.25,33 ; 44,-32.5 44,33 ; 51.5,-33.5 53.5,-31.5 ; 51.5,-31.5 53.5,-33.5 ; 53.5,-22.5 55.5,-20.5 ; 53.5,-20.5 55.5,-22.5 ; 53.5,26.5 55.5,28.5 ; 53.5,28.5 55.5,26.5 ; 54.5,-32.5 54.5,33 ; 92.5,-33.5 94.5,-31.5 ; 92.5,-31.5 94.5,-33.5 ; 92.5,32 94.5,34 ; 92.5,34 94.5,32 ; -37.5,-32.5 ccw(c-32.5,-32.5) -32.5,-37.5 93.5,-37.5 ccw(c93.5,-32.5) 98.5,-32.5 98.5,33 ccw(c93.5,33) 93.5,38 -32.5,38 ccw(c-32.5,33) -37.5,33 -37.5,-32.5 ; -32.5,-32.5 93.5,-32.5 93.5,33 -32.5,33 -32.5,-32.5
  lines w0.3: -37.5,-32.5 ccw(c-32.5,-32.5) -32.5,-37.5 93.5,-37.5 ccw(c93.5,-32.5) 98.5,-32.5 98.5,33 ccw(c93.5,33) 93.5,38 -32.5,38 ccw(c-32.5,33) -37.5,33 -37.5,-32.5
  text "Шлейф дисплея" at 27.48,-27.133 h2
Aux 2:
  the board outline again, w0.3

## Text inside footprints (layer, text, board x,y; h text height)
X314: Bottom Overlay "80" at 10.167,24 h0.5; Bottom Overlay "2" at -9.583,24 h0.5; Bottom Overlay "79" at 10.167,18.5 h0.5; Bottom Overlay "1" at -9.667,18.5 h0.5
X315: Bottom Overlay "80" at 10.167,-19 h0.5; Bottom Overlay "2" at -9.583,-19 h0.5; Bottom Overlay "79" at 10.167,-24.5 h0.5; Bottom Overlay "1" at -9.667,-24.5 h0.5